# EAGLE board led_strip_panel (EAGLE 8.4.2)
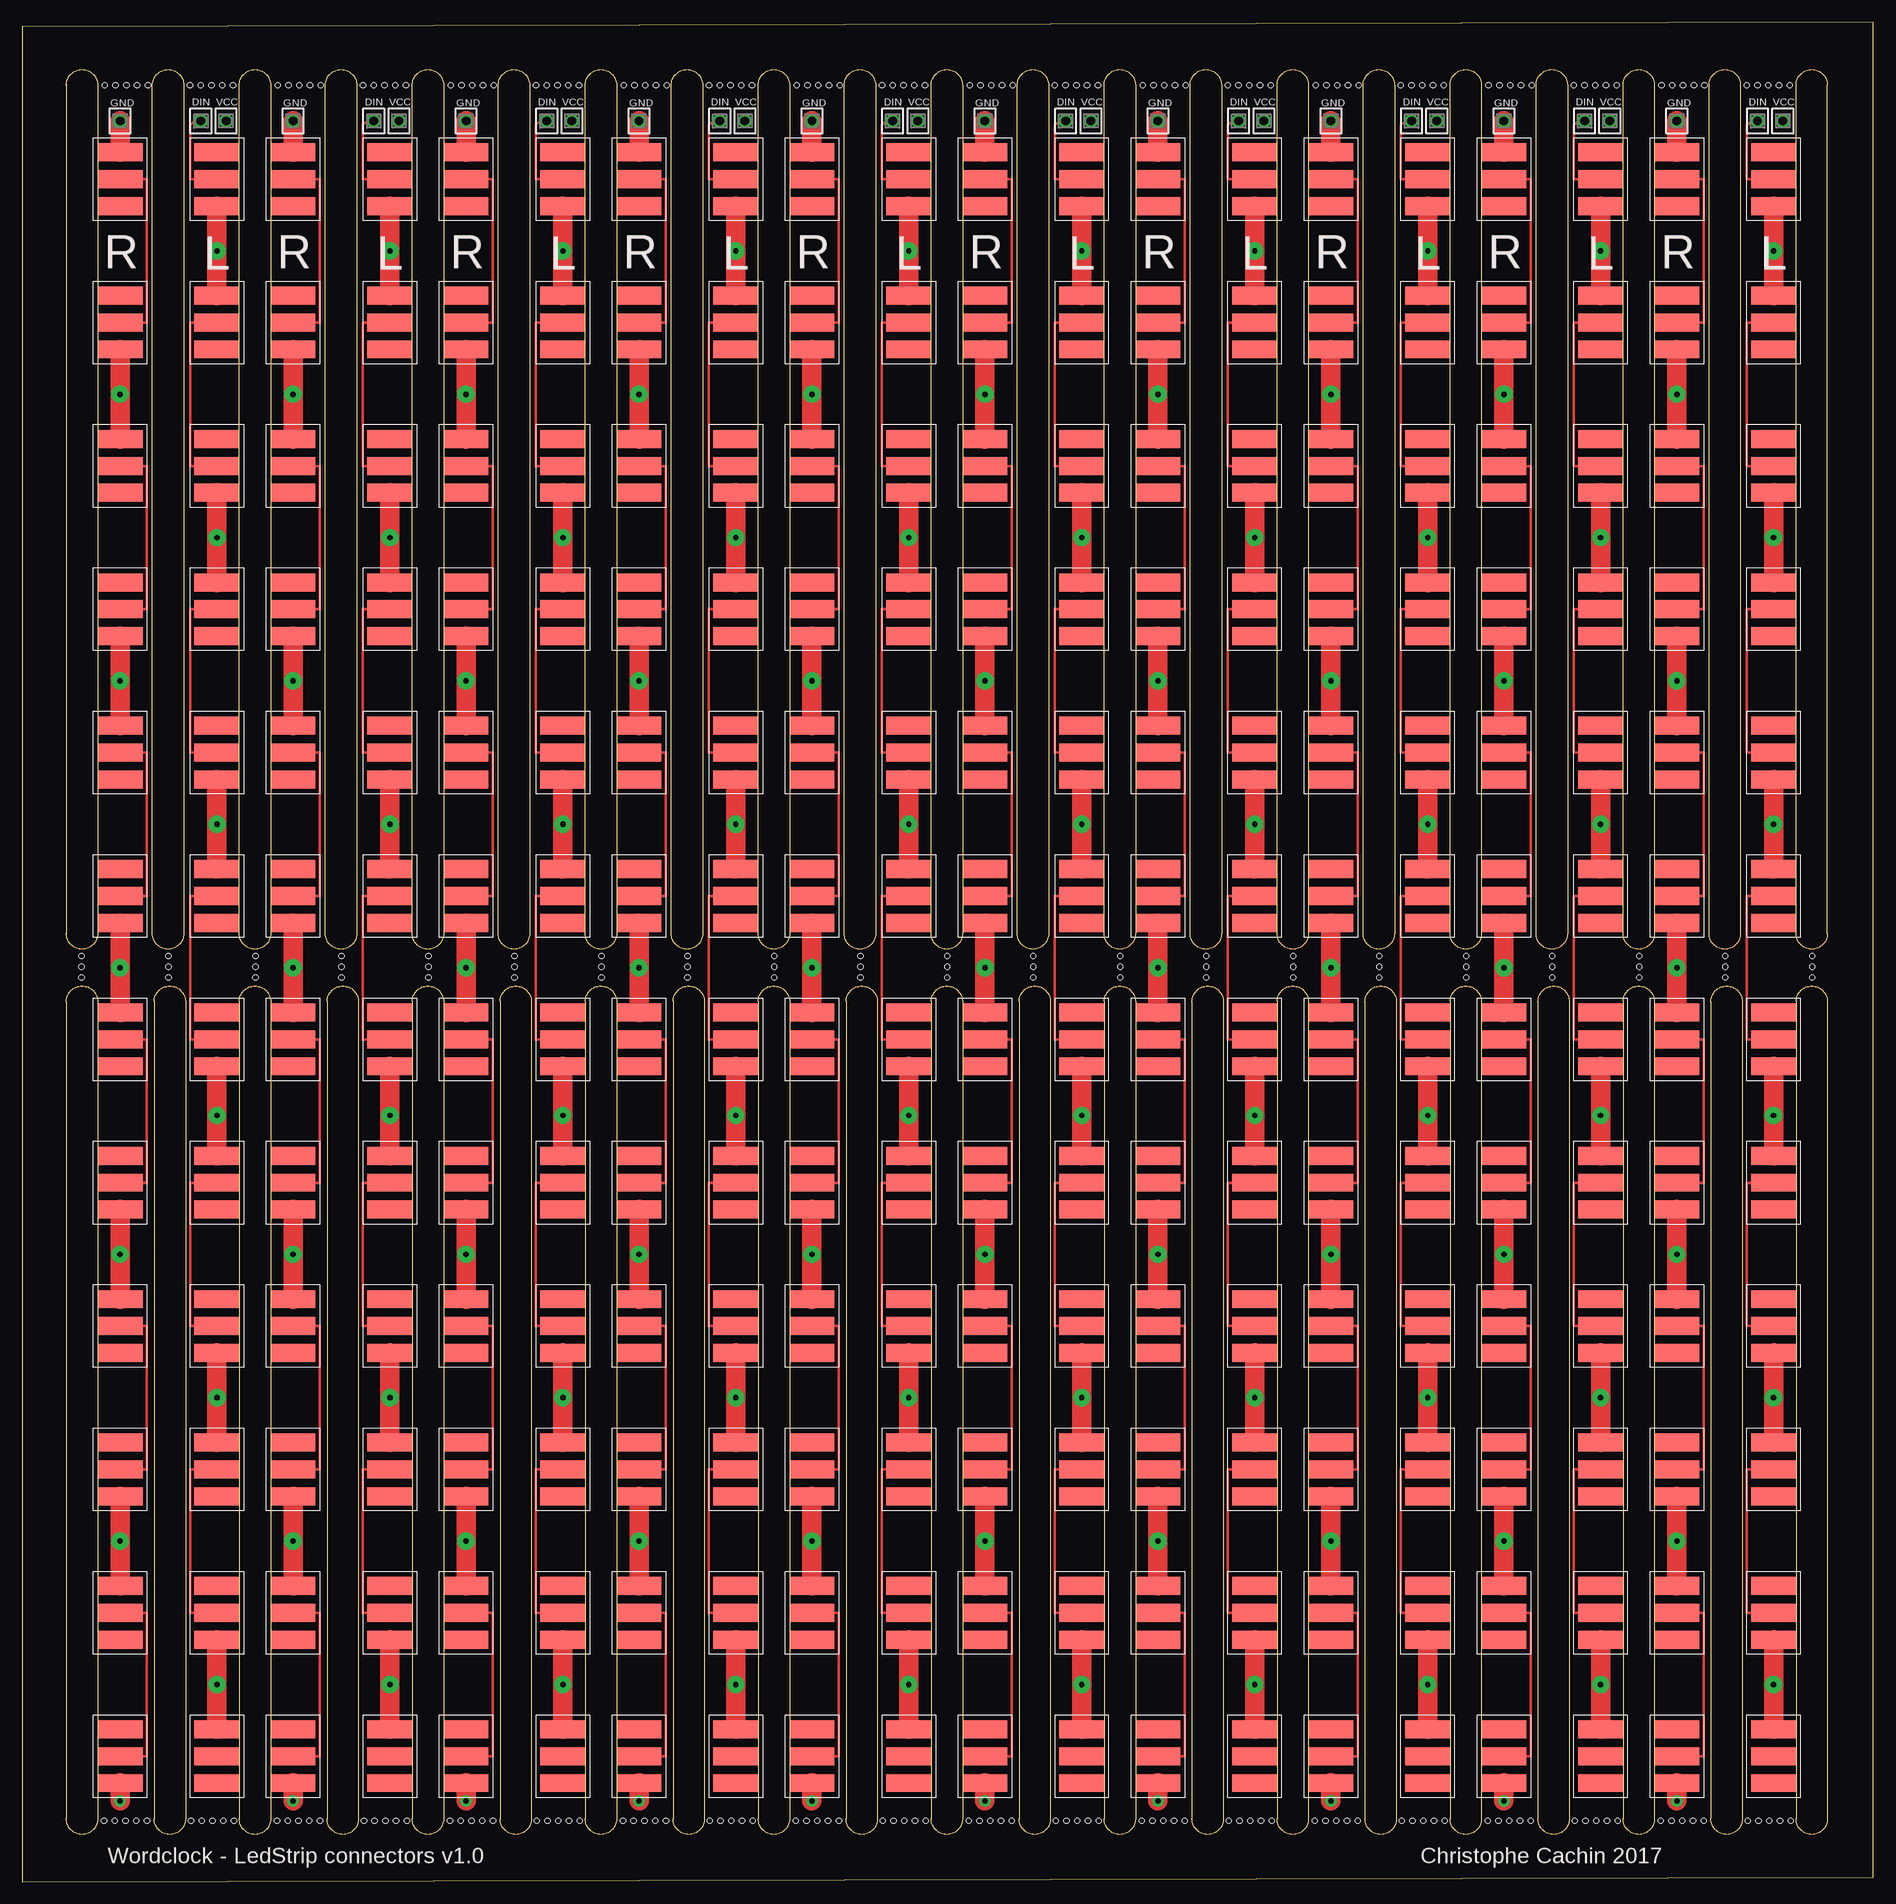
[diagram p0: board, top side]
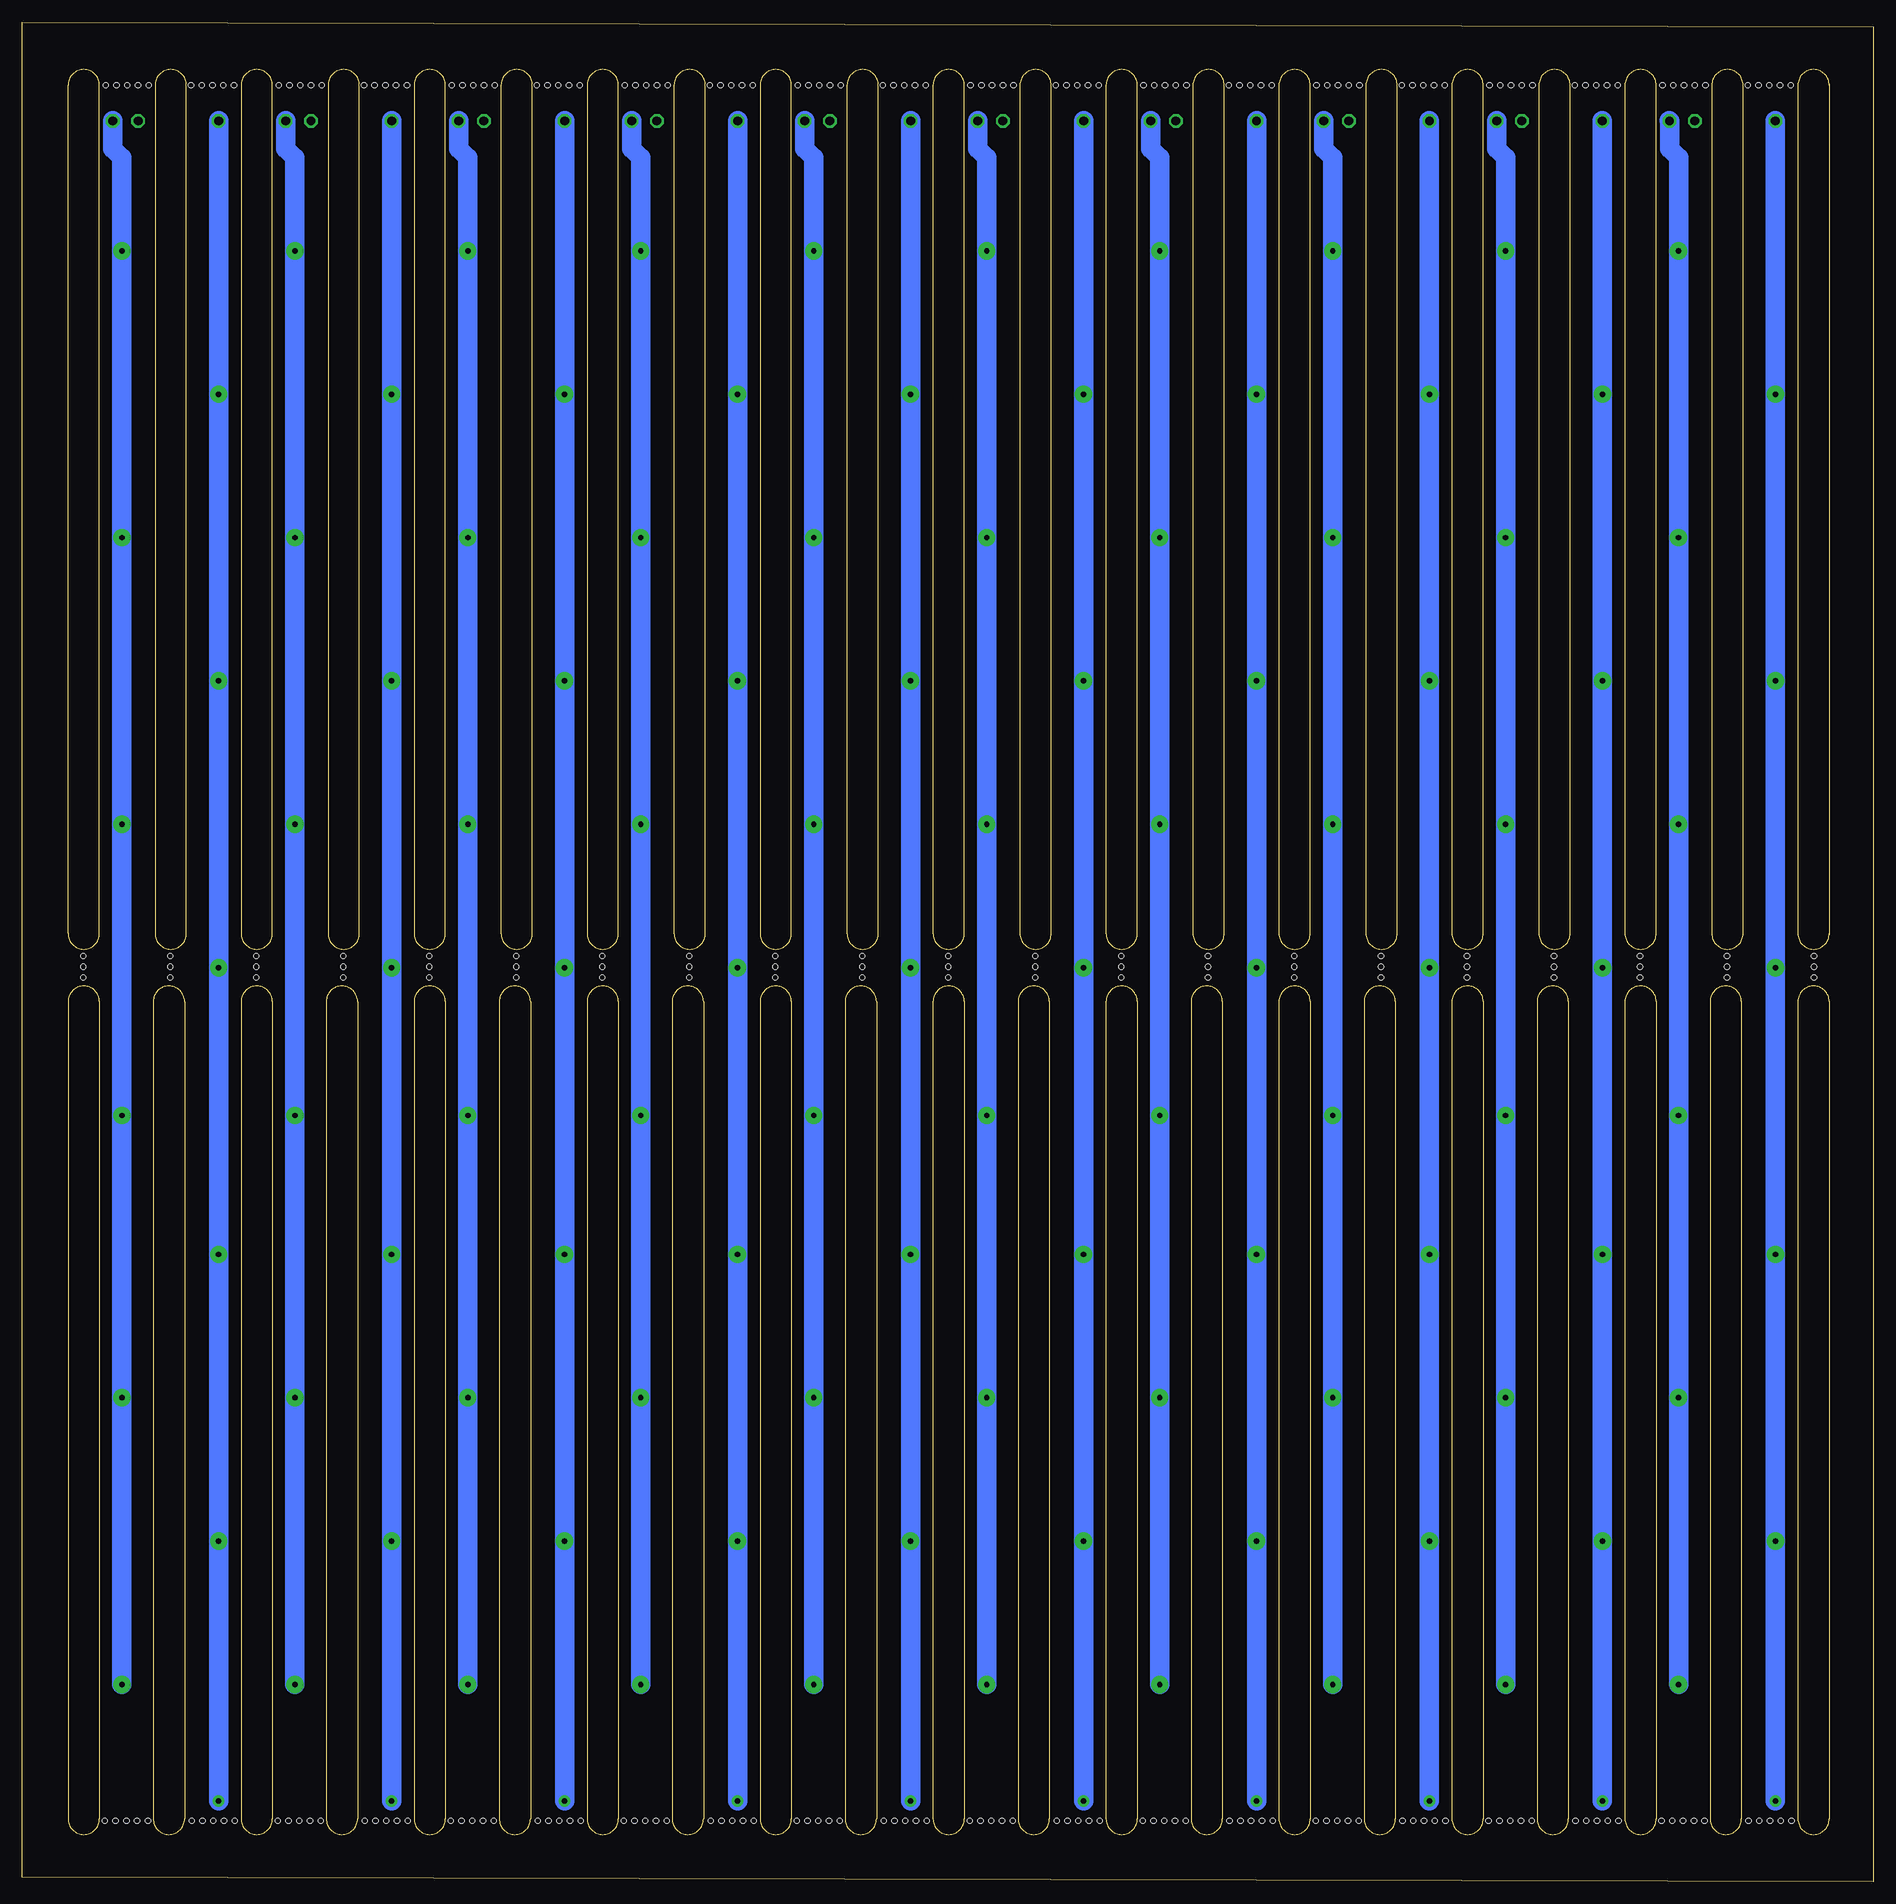
[diagram p1: board, bottom side, seen from below]

Size 206.5 x 207.5 mm. Coordinates in mm from the lower left corner, seen from the top.
Outline: 172 segments
Copper layers (1*16): Top 0.035mm / dielectric 1.5mm / Bottom 0.035mm
Design rules "default": minimum track width 10mil, minimum drill 24mil, track to track 8mil, track to pad 8mil, pad to pad 8mil, via to via 8mil, smd to smd 8mil, copper to edge 40mil, drill to drill 8mil, minimum pad ring 10mil, minimum via ring 8mil, stop-mask expansion 4mil, vias tented up to drill 0mil, thermal gap 10mil
Holes 0.6 mm at 9.2,200.5 10.4,200.5 11.6,200.5 12.8,200.5 18.7,200.5 19.9,200.5 21.1,200.5 22.3,200.5 14,200.5 23.5,200.5 9.1,6.8 10.3,6.8 11.5,6.8 12.7,6.8 13.9,6.8 18.8,6.8 20,6.8 21.2,6.8 22.4,6.8 23.6,6.8 6.6,100.9 6.6,102.1 6.6,103.3 16.3,100.9 16.3,102.1 16.3,103.3 26,100.9 26,102.1 26,103.3 28.5,200.5 29.7,200.5 30.9,200.5 32.1,200.5 38,200.5 39.2,200.5 40.4,200.5 41.6,200.5 33.3,200.5 42.8,200.5 28.4,6.8 29.6,6.8 30.8,6.8 32,6.8 33.2,6.8 38.1,6.8 39.3,6.8 40.5,6.8 41.7,6.8 42.9,6.8 35.6,100.9 35.6,102.1 35.6,103.3 45.3,100.9 45.3,102.1 45.3,103.3 47.8,200.5 49,200.5 50.2,200.5 51.4,200.5 57.3,200.5 58.5,200.5 59.7,200.5 60.9,200.5 52.6,200.5 62.1,200.5 47.7,6.8 48.9,6.8 50.1,6.8 51.3,6.8 52.5,6.8 57.4,6.8 58.6,6.8 59.8,6.8 61,6.8 62.2,6.8 54.9,100.9 54.9,102.1 54.9,103.3 64.6,100.9 64.6,102.1 64.6,103.3 67.1,200.5 68.3,200.5 69.5,200.5 70.7,200.5 76.6,200.5 77.8,200.5 79,200.5 80.2,200.5 71.9,200.5 81.4,200.5 67,6.8 68.2,6.8 69.4,6.8 70.6,6.8 71.8,6.8 76.7,6.8 77.9,6.8 79.1,6.8 80.3,6.8 81.5,6.8 74.2,100.9 74.2,102.1 74.2,103.3 83.9,100.9 83.9,102.1 83.9,103.3 86.4,200.5 87.6,200.5 88.8,200.5 90,200.5 95.9,200.5 97.1,200.5 98.3,200.5 99.5,200.5 91.2,200.5 100.7,200.5 86.3,6.8 87.5,6.8 88.7,6.8 89.9,6.8 91.1,6.8 96,6.8 97.2,6.8 98.4,6.8 99.6,6.8 100.8,6.8 93.5,100.9 93.5,102.1 93.5,103.3 103.2,100.9 103.2,102.1 103.2,103.3 105.7,200.5 106.9,200.5 108.1,200.5 109.3,200.5 115.2,200.5 116.4,200.5 117.6,200.5 118.8,200.5 110.5,200.5 120,200.5 105.6,6.8 106.8,6.8 108,6.8 109.2,6.8 110.4,6.8 115.3,6.8 116.5,6.8 117.7,6.8 118.9,6.8 120.1,6.8 112.8,100.9 112.8,102.1 112.8,103.3 122.5,100.9 122.5,102.1 122.5,103.3 125,200.5 126.2,200.5 127.4,200.5 128.6,200.5 134.5,200.5 135.7,200.5 136.9,200.5 138.1,200.5 129.8,200.5 139.3,200.5 124.9,6.8 126.1,6.8 127.3,6.8 128.5,6.8 129.7,6.8 134.6,6.8 135.8,6.8 137,6.8 138.2,6.8 139.4,6.8 132.1,100.9 132.1,102.1 132.1,103.3 141.8,100.9 141.8,102.1 141.8,103.3 144.3,200.5 145.5,200.5 146.7,200.5 147.9,200.5 153.8,200.5 155,200.5 156.2,200.5 157.4,200.5 149.1,200.5 158.6,200.5 144.2,6.8 145.4,6.8 146.6,6.8 147.8,6.8 149,6.8 153.9,6.8 155.1,6.8 156.3,6.8 157.5,6.8 158.7,6.8 151.4,100.9 151.4,102.1 151.4,103.3 161.1,100.9 161.1,102.1 161.1,103.3 163.6,200.5 164.8,200.5 166,200.5 167.2,200.5 173.1,200.5 174.3,200.5 175.5,200.5 176.7,200.5 168.4,200.5 177.9,200.5 163.5,6.8 164.7,6.8 165.9,6.8 167.1,6.8 168.3,6.8 173.2,6.8 174.4,6.8 175.6,6.8 176.8,6.8 178,6.8 170.7,100.9 170.7,102.1 170.7,103.3 180.4,100.9 180.4,102.1 180.4,103.3 182.9,200.5 184.1,200.5 185.3,200.5 186.5,200.5 192.4,200.5 193.6,200.5 194.8,200.5 196,200.5 187.7,200.5 197.2,200.5 182.8,6.8 184,6.8 185.2,6.8 186.4,6.8 187.6,6.8 192.5,6.8 193.7,6.8 194.9,6.8 196.1,6.8 197.3,6.8 190,100.9 190,102.1 190,103.3 199.7,100.9 199.7,102.1 199.7,103.3

## Footprints (pad centres in the part's own frame; a part is rotated, then mirrored left to right if it is on the bottom)
LED_STRIP = smd 5 x 2: DATAS 0,0; P$1 0,3; P$2 0,-3
SSW-101-02-S-S = drill 1 pad 1.5 octagon: 1 0,0

## Placement (x,y rotation side)
1  1  [LED_STRIP]  10.9,190 0 top
2  LED_STRIP  [LED_STRIP]  10.9,174 180 top
3  LED_STRIP  [LED_STRIP]  10.9,158 0 top
4  LED_STRIP  [LED_STRIP]  10.9,142 180 top
5  LED_STRIP  [LED_STRIP]  10.9,126 0 top
6  LED_STRIP  [LED_STRIP]  10.9,110 180 top
7  LED_STRIP  [LED_STRIP]  10.9,94 0 top
8  LED_STRIP  [LED_STRIP]  10.9,78 180 top
9  LED_STRIP  [LED_STRIP]  10.9,62 0 top
10  LED_STRIP  [LED_STRIP]  10.9,46 180 top
11  LED_STRIP  [LED_STRIP]  10.9,30 0 top
12  LED_STRIP  [LED_STRIP]  10.9,14 180 top
13  LED_STRIP  [LED_STRIP]  21.7,190 0 top
14  LED_STRIP  [LED_STRIP]  21.7,174 180 top
15  LED_STRIP  [LED_STRIP]  21.7,158 0 top
16  LED_STRIP  [LED_STRIP]  21.7,142 180 top
17  LED_STRIP  [LED_STRIP]  21.7,126 0 top
18  LED_STRIP  [LED_STRIP]  21.7,110 180 top
19  LED_STRIP  [LED_STRIP]  21.7,94 0 top
20  LED_STRIP  [LED_STRIP]  21.7,78 180 top
21  LED_STRIP  [LED_STRIP]  21.7,62 0 top
22  LED_STRIP  [LED_STRIP]  21.7,46 180 top
23  LED_STRIP  [LED_STRIP]  21.7,30 0 top
24  LED_STRIP  [LED_STRIP]  21.7,14 180 top
25  1  [LED_STRIP]  30.2,190 0 top
26  LED_STRIP  [LED_STRIP]  30.2,46 180 top
27  LED_STRIP  [LED_STRIP]  30.2,30 0 top
28  LED_STRIP  [LED_STRIP]  30.2,14 180 top
29  LED_STRIP  [LED_STRIP]  41,190 0 top
30  LED_STRIP  [LED_STRIP]  41,174 180 top
31  LED_STRIP  [LED_STRIP]  41,158 0 top
32  LED_STRIP  [LED_STRIP]  41,142 180 top
33  LED_STRIP  [LED_STRIP]  41,126 0 top
34  LED_STRIP  [LED_STRIP]  41,110 180 top
35  LED_STRIP  [LED_STRIP]  41,94 0 top
36  LED_STRIP  [LED_STRIP]  30.2,174 180 top
37  LED_STRIP  [LED_STRIP]  41,78 180 top
38  LED_STRIP  [LED_STRIP]  41,62 0 top
39  LED_STRIP  [LED_STRIP]  41,46 180 top
40  LED_STRIP  [LED_STRIP]  41,30 0 top
41  LED_STRIP  [LED_STRIP]  41,14 180 top
42  LED_STRIP  [LED_STRIP]  30.2,158 0 top
43  LED_STRIP  [LED_STRIP]  30.2,142 180 top
44  LED_STRIP  [LED_STRIP]  30.2,126 0 top
45  LED_STRIP  [LED_STRIP]  30.2,110 180 top
46  LED_STRIP  [LED_STRIP]  30.2,94 0 top
47  LED_STRIP  [LED_STRIP]  30.2,78 180 top
48  LED_STRIP  [LED_STRIP]  30.2,62 0 top
49  1  [LED_STRIP]  49.5,190 0 top
50  LED_STRIP  [LED_STRIP]  49.5,46 180 top
51  LED_STRIP  [LED_STRIP]  49.5,30 0 top
52  LED_STRIP  [LED_STRIP]  49.5,14 180 top
53  LED_STRIP  [LED_STRIP]  60.3,190 0 top
54  LED_STRIP  [LED_STRIP]  60.3,174 180 top
55  LED_STRIP  [LED_STRIP]  60.3,158 0 top
56  LED_STRIP  [LED_STRIP]  60.3,142 180 top
57  LED_STRIP  [LED_STRIP]  60.3,126 0 top
58  LED_STRIP  [LED_STRIP]  60.3,110 180 top
59  LED_STRIP  [LED_STRIP]  60.3,94 0 top
60  LED_STRIP  [LED_STRIP]  49.5,174 180 top
61  LED_STRIP  [LED_STRIP]  60.3,78 180 top
62  LED_STRIP  [LED_STRIP]  60.3,62 0 top
63  LED_STRIP  [LED_STRIP]  60.3,46 180 top
64  LED_STRIP  [LED_STRIP]  60.3,30 0 top
65  LED_STRIP  [LED_STRIP]  60.3,14 180 top
66  LED_STRIP  [LED_STRIP]  49.5,158 0 top
67  LED_STRIP  [LED_STRIP]  49.5,142 180 top
68  LED_STRIP  [LED_STRIP]  49.5,126 0 top
69  LED_STRIP  [LED_STRIP]  49.5,110 180 top
70  LED_STRIP  [LED_STRIP]  49.5,94 0 top
71  LED_STRIP  [LED_STRIP]  49.5,78 180 top
72  LED_STRIP  [LED_STRIP]  49.5,62 0 top
73  1  [LED_STRIP]  68.8,190 0 top
74  LED_STRIP  [LED_STRIP]  68.8,46 180 top
75  LED_STRIP  [LED_STRIP]  68.8,30 0 top
76  LED_STRIP  [LED_STRIP]  68.8,14 180 top
77  LED_STRIP  [LED_STRIP]  79.6,190 0 top
78  LED_STRIP  [LED_STRIP]  79.6,174 180 top
79  LED_STRIP  [LED_STRIP]  79.6,158 0 top
80  LED_STRIP  [LED_STRIP]  79.6,142 180 top
81  LED_STRIP  [LED_STRIP]  79.6,126 0 top
82  LED_STRIP  [LED_STRIP]  79.6,110 180 top
83  LED_STRIP  [LED_STRIP]  79.6,94 0 top
84  LED_STRIP  [LED_STRIP]  68.8,174 180 top
85  LED_STRIP  [LED_STRIP]  79.6,78 180 top
86  LED_STRIP  [LED_STRIP]  79.6,62 0 top
87  LED_STRIP  [LED_STRIP]  79.6,46 180 top
88  LED_STRIP  [LED_STRIP]  79.6,30 0 top
89  LED_STRIP  [LED_STRIP]  79.6,14 180 top
90  LED_STRIP  [LED_STRIP]  68.8,158 0 top
91  LED_STRIP  [LED_STRIP]  68.8,142 180 top
92  LED_STRIP  [LED_STRIP]  68.8,126 0 top
93  LED_STRIP  [LED_STRIP]  68.8,110 180 top
94  LED_STRIP  [LED_STRIP]  68.8,94 0 top
95  LED_STRIP  [LED_STRIP]  68.8,78 180 top
96  LED_STRIP  [LED_STRIP]  68.8,62 0 top
97  1  [LED_STRIP]  88.1,190 0 top
98  LED_STRIP  [LED_STRIP]  88.1,46 180 top
99  LED_STRIP  [LED_STRIP]  88.1,30 0 top
100  LED_STRIP  [LED_STRIP]  88.1,14 180 top
101  LED_STRIP  [LED_STRIP]  98.9,190 0 top
102  LED_STRIP  [LED_STRIP]  98.9,174 180 top
103  LED_STRIP  [LED_STRIP]  98.9,158 0 top
104  LED_STRIP  [LED_STRIP]  98.9,142 180 top
105  LED_STRIP  [LED_STRIP]  98.9,126 0 top
106  LED_STRIP  [LED_STRIP]  98.9,110 180 top
107  LED_STRIP  [LED_STRIP]  98.9,94 0 top
108  LED_STRIP  [LED_STRIP]  88.1,174 180 top
109  LED_STRIP  [LED_STRIP]  98.9,78 180 top
110  LED_STRIP  [LED_STRIP]  98.9,62 0 top
111  LED_STRIP  [LED_STRIP]  98.9,46 180 top
112  LED_STRIP  [LED_STRIP]  98.9,30 0 top
113  LED_STRIP  [LED_STRIP]  98.9,14 180 top
114  LED_STRIP  [LED_STRIP]  88.1,158 0 top
115  LED_STRIP  [LED_STRIP]  88.1,142 180 top
116  LED_STRIP  [LED_STRIP]  88.1,126 0 top
117  LED_STRIP  [LED_STRIP]  88.1,110 180 top
118  LED_STRIP  [LED_STRIP]  88.1,94 0 top
119  LED_STRIP  [LED_STRIP]  88.1,78 180 top
120  LED_STRIP  [LED_STRIP]  88.1,62 0 top
121  1  [LED_STRIP]  107.4,190 0 top
122  LED_STRIP  [LED_STRIP]  107.4,46 180 top
123  LED_STRIP  [LED_STRIP]  107.4,30 0 top
124  LED_STRIP  [LED_STRIP]  107.4,14 180 top
125  LED_STRIP  [LED_STRIP]  118.2,190 0 top
126  LED_STRIP  [LED_STRIP]  118.2,174 180 top
127  LED_STRIP  [LED_STRIP]  118.2,158 0 top
128  LED_STRIP  [LED_STRIP]  118.2,142 180 top
129  LED_STRIP  [LED_STRIP]  118.2,126 0 top
130  LED_STRIP  [LED_STRIP]  118.2,110 180 top
131  LED_STRIP  [LED_STRIP]  118.2,94 0 top
132  LED_STRIP  [LED_STRIP]  107.4,174 180 top
133  LED_STRIP  [LED_STRIP]  118.2,78 180 top
134  LED_STRIP  [LED_STRIP]  118.2,62 0 top
135  LED_STRIP  [LED_STRIP]  118.2,46 180 top
136  LED_STRIP  [LED_STRIP]  118.2,30 0 top
137  LED_STRIP  [LED_STRIP]  118.2,14 180 top
138  LED_STRIP  [LED_STRIP]  107.4,158 0 top
139  LED_STRIP  [LED_STRIP]  107.4,142 180 top
140  LED_STRIP  [LED_STRIP]  107.4,126 0 top
141  LED_STRIP  [LED_STRIP]  107.4,110 180 top
142  LED_STRIP  [LED_STRIP]  107.4,94 0 top
143  LED_STRIP  [LED_STRIP]  107.4,78 180 top
144  LED_STRIP  [LED_STRIP]  107.4,62 0 top
145  1  [LED_STRIP]  126.7,190 0 top
146  LED_STRIP  [LED_STRIP]  126.7,46 180 top
147  LED_STRIP  [LED_STRIP]  126.7,30 0 top
148  LED_STRIP  [LED_STRIP]  126.7,14 180 top
149  LED_STRIP  [LED_STRIP]  137.5,190 0 top
150  LED_STRIP  [LED_STRIP]  137.5,174 180 top
151  LED_STRIP  [LED_STRIP]  137.5,158 0 top
152  LED_STRIP  [LED_STRIP]  137.5,142 180 top
153  LED_STRIP  [LED_STRIP]  137.5,126 0 top
154  LED_STRIP  [LED_STRIP]  137.5,110 180 top
155  LED_STRIP  [LED_STRIP]  137.5,94 0 top
156  LED_STRIP  [LED_STRIP]  126.7,174 180 top
157  LED_STRIP  [LED_STRIP]  137.5,78 180 top
158  LED_STRIP  [LED_STRIP]  137.5,62 0 top
159  LED_STRIP  [LED_STRIP]  137.5,46 180 top
160  LED_STRIP  [LED_STRIP]  137.5,30 0 top
161  LED_STRIP  [LED_STRIP]  137.5,14 180 top
162  LED_STRIP  [LED_STRIP]  126.7,158 0 top
163  LED_STRIP  [LED_STRIP]  126.7,142 180 top
164  LED_STRIP  [LED_STRIP]  126.7,126 0 top
165  LED_STRIP  [LED_STRIP]  126.7,110 180 top
166  LED_STRIP  [LED_STRIP]  126.7,94 0 top
167  LED_STRIP  [LED_STRIP]  126.7,78 180 top
168  LED_STRIP  [LED_STRIP]  126.7,62 0 top
169  1  [LED_STRIP]  146,190 0 top
170  LED_STRIP  [LED_STRIP]  146,46 180 top
171  LED_STRIP  [LED_STRIP]  146,30 0 top
172  LED_STRIP  [LED_STRIP]  146,14 180 top
173  LED_STRIP  [LED_STRIP]  156.8,190 0 top
174  LED_STRIP  [LED_STRIP]  156.8,174 180 top
175  LED_STRIP  [LED_STRIP]  156.8,158 0 top
176  LED_STRIP  [LED_STRIP]  156.8,142 180 top
177  LED_STRIP  [LED_STRIP]  156.8,126 0 top
178  LED_STRIP  [LED_STRIP]  156.8,110 180 top
179  LED_STRIP  [LED_STRIP]  156.8,94 0 top
180  LED_STRIP  [LED_STRIP]  146,174 180 top
181  LED_STRIP  [LED_STRIP]  156.8,78 180 top
182  LED_STRIP  [LED_STRIP]  156.8,62 0 top
183  LED_STRIP  [LED_STRIP]  156.8,46 180 top
184  LED_STRIP  [LED_STRIP]  156.8,30 0 top
185  LED_STRIP  [LED_STRIP]  156.8,14 180 top
186  LED_STRIP  [LED_STRIP]  146,158 0 top
187  LED_STRIP  [LED_STRIP]  146,142 180 top
188  LED_STRIP  [LED_STRIP]  146,126 0 top
189  LED_STRIP  [LED_STRIP]  146,110 180 top
190  LED_STRIP  [LED_STRIP]  146,94 0 top
191  LED_STRIP  [LED_STRIP]  146,78 180 top
192  LED_STRIP  [LED_STRIP]  146,62 0 top
193  1  [LED_STRIP]  165.3,190 0 top
194  LED_STRIP  [LED_STRIP]  165.3,46 180 top
195  LED_STRIP  [LED_STRIP]  165.3,30 0 top
196  LED_STRIP  [LED_STRIP]  165.3,14 180 top
197  LED_STRIP  [LED_STRIP]  176.1,190 0 top
198  LED_STRIP  [LED_STRIP]  176.1,174 180 top
199  LED_STRIP  [LED_STRIP]  176.1,158 0 top
200  LED_STRIP  [LED_STRIP]  176.1,142 180 top
201  LED_STRIP  [LED_STRIP]  176.1,126 0 top
202  LED_STRIP  [LED_STRIP]  176.1,110 180 top
203  LED_STRIP  [LED_STRIP]  176.1,94 0 top
204  LED_STRIP  [LED_STRIP]  165.3,174 180 top
205  LED_STRIP  [LED_STRIP]  176.1,78 180 top
206  LED_STRIP  [LED_STRIP]  176.1,62 0 top
207  LED_STRIP  [LED_STRIP]  176.1,46 180 top
208  LED_STRIP  [LED_STRIP]  176.1,30 0 top
209  LED_STRIP  [LED_STRIP]  176.1,14 180 top
210  LED_STRIP  [LED_STRIP]  165.3,158 0 top
211  LED_STRIP  [LED_STRIP]  165.3,142 180 top
212  LED_STRIP  [LED_STRIP]  165.3,126 0 top
213  LED_STRIP  [LED_STRIP]  165.3,110 180 top
214  LED_STRIP  [LED_STRIP]  165.3,94 0 top
215  LED_STRIP  [LED_STRIP]  165.3,78 180 top
216  LED_STRIP  [LED_STRIP]  165.3,62 0 top
217  1  [LED_STRIP]  184.6,190 0 top
218  LED_STRIP  [LED_STRIP]  184.6,46 180 top
219  LED_STRIP  [LED_STRIP]  184.6,30 0 top
220  LED_STRIP  [LED_STRIP]  184.6,14 180 top
221  LED_STRIP  [LED_STRIP]  195.4,190 0 top
222  LED_STRIP  [LED_STRIP]  195.4,174 180 top
223  LED_STRIP  [LED_STRIP]  195.4,158 0 top
224  LED_STRIP  [LED_STRIP]  195.4,142 180 top
225  LED_STRIP  [LED_STRIP]  195.4,126 0 top
226  LED_STRIP  [LED_STRIP]  195.4,110 180 top
227  LED_STRIP  [LED_STRIP]  195.4,94 0 top
228  LED_STRIP  [LED_STRIP]  184.6,174 180 top
229  LED_STRIP  [LED_STRIP]  195.4,78 180 top
230  LED_STRIP  [LED_STRIP]  195.4,62 0 top
231  LED_STRIP  [LED_STRIP]  195.4,46 180 top
232  LED_STRIP  [LED_STRIP]  195.4,30 0 top
233  LED_STRIP  [LED_STRIP]  195.4,14 180 top
234  LED_STRIP  [LED_STRIP]  184.6,158 0 top
235  LED_STRIP  [LED_STRIP]  184.6,142 180 top
236  LED_STRIP  [LED_STRIP]  184.6,126 0 top
237  LED_STRIP  [LED_STRIP]  184.6,110 180 top
238  LED_STRIP  [LED_STRIP]  184.6,94 0 top
239  LED_STRIP  [LED_STRIP]  184.6,78 180 top
240  LED_STRIP  [LED_STRIP]  184.6,62 0 top
DIN  DATA  [SSW-101-02-S-S]  19.9,196.5 270 top
DIN1  DATA  [SSW-101-02-S-S]  39.2,196.5 270 top
DIN2  DATA  [SSW-101-02-S-S]  58.5,196.5 270 top
DIN3  DATA  [SSW-101-02-S-S]  77.8,196.5 270 top
DIN4  DATA  [SSW-101-02-S-S]  97.1,196.5 270 top
DIN5  DATA  [SSW-101-02-S-S]  116.4,196.5 270 top
DIN6  DATA  [SSW-101-02-S-S]  135.7,196.5 270 top
DIN7  DATA  [SSW-101-02-S-S]  155,196.5 270 top
DIN8  DATA  [SSW-101-02-S-S]  174.3,196.5 270 top
DIN9  DATA  [SSW-101-02-S-S]  193.6,196.5 270 top
GND  GND  [SSW-101-02-S-S]  10.9,196.5 90 top
GND1  GND  [SSW-101-02-S-S]  30.2,196.5 90 top
GND2  GND  [SSW-101-02-S-S]  49.5,196.5 90 top
GND3  GND  [SSW-101-02-S-S]  68.8,196.5 90 top
GND4  GND  [SSW-101-02-S-S]  88.1,196.5 90 top
GND5  GND  [SSW-101-02-S-S]  107.4,196.5 90 top
GND6  GND  [SSW-101-02-S-S]  126.7,196.5 90 top
GND7  GND  [SSW-101-02-S-S]  146,196.5 90 top
GND8  GND  [SSW-101-02-S-S]  165.3,196.5 90 top
GND9  GND  [SSW-101-02-S-S]  184.6,196.5 90 top
VCC  VCC  [SSW-101-02-S-S]  22.72,196.5 90 top
VCC1  VCC  [SSW-101-02-S-S]  42.02,196.5 90 top
VCC2  VCC  [SSW-101-02-S-S]  61.32,196.5 90 top
VCC3  VCC  [SSW-101-02-S-S]  80.62,196.5 90 top
VCC4  VCC  [SSW-101-02-S-S]  99.92,196.5 90 top
VCC5  VCC  [SSW-101-02-S-S]  119.22,196.5 90 top
VCC6  VCC  [SSW-101-02-S-S]  138.52,196.5 90 top
VCC7  VCC  [SSW-101-02-S-S]  157.82,196.5 90 top
VCC8  VCC  [SSW-101-02-S-S]  177.12,196.5 90 top
VCC9  VCC  [SSW-101-02-S-S]  196.42,196.5 90 top

## Library data of the parts
1-240 = led_strip
DIN DIN1-DIN9 GND GND1-GND9 VCC VCC1-VCC9 = con-samtec; MPN: SSW-101-02-S-S; OC_FARNELL: unknown; OC_NEWARK: 11P9336

## Nets
GND: 1.P$1 2.P$1 3.P$1 4.P$1 5.P$1 6.P$1 7.P$1 8.P$1 9.P$1 10.P$1 11.P$1 12.P$1 GND.1
GND1: 25.P$1 26.P$1 27.P$1 28.P$1 36.P$1 42.P$1 43.P$1 44.P$1 45.P$1 46.P$1 47.P$1 48.P$1 GND1.1
GND2: 49.P$1 50.P$1 51.P$1 52.P$1 60.P$1 66.P$1 67.P$1 68.P$1 69.P$1 70.P$1 71.P$1 72.P$1 GND2.1
GND3: 73.P$1 74.P$1 75.P$1 76.P$1 84.P$1 90.P$1 91.P$1 92.P$1 93.P$1 94.P$1 95.P$1 96.P$1 GND3.1
GND4: 97.P$1 98.P$1 99.P$1 100.P$1 108.P$1 114.P$1 115.P$1 116.P$1 117.P$1 118.P$1 119.P$1 120.P$1 GND4.1
GND5: 121.P$1 122.P$1 123.P$1 124.P$1 132.P$1 138.P$1 139.P$1 140.P$1 141.P$1 142.P$1 143.P$1 144.P$1 GND5.1
GND6: 145.P$1 146.P$1 147.P$1 148.P$1 156.P$1 162.P$1 163.P$1 164.P$1 165.P$1 166.P$1 167.P$1 168.P$1 GND6.1
GND7: 169.P$1 170.P$1 171.P$1 172.P$1 180.P$1 186.P$1 187.P$1 188.P$1 189.P$1 190.P$1 191.P$1 192.P$1 GND7.1
GND8: 193.P$1 194.P$1 195.P$1 196.P$1 204.P$1 210.P$1 211.P$1 212.P$1 213.P$1 214.P$1 215.P$1 216.P$1 GND8.1
GND9: 217.P$1 218.P$1 219.P$1 220.P$1 228.P$1 234.P$1 235.P$1 236.P$1 237.P$1 238.P$1 239.P$1 240.P$1 GND9.1
N$1: 13.DATAS DIN.1
N$2: 1.DATAS 2.DATAS
N$3: 14.DATAS 15.DATAS
N$4: 3.DATAS 4.DATAS
N$5: 16.DATAS 17.DATAS
N$6: 5.DATAS 6.DATAS
N$7: 18.DATAS 19.DATAS
N$8: 7.DATAS 8.DATAS
N$9: 20.DATAS 21.DATAS
N$10: 22.DATAS 23.DATAS
N$11: 9.DATAS 10.DATAS
N$12: 11.DATAS 12.DATAS
N$13: 29.DATAS DIN1.1
N$14: 25.DATAS 36.DATAS
N$15: 30.DATAS 31.DATAS
N$16: 42.DATAS 43.DATAS
N$17: 32.DATAS 33.DATAS
N$18: 44.DATAS 45.DATAS
N$19: 34.DATAS 35.DATAS
N$20: 46.DATAS 47.DATAS
N$21: 37.DATAS 38.DATAS
N$22: 39.DATAS 40.DATAS
N$23: 26.DATAS 48.DATAS
N$24: 27.DATAS 28.DATAS
N$25: 53.DATAS DIN2.1
N$26: 49.DATAS 60.DATAS
N$27: 54.DATAS 55.DATAS
N$28: 66.DATAS 67.DATAS
N$29: 56.DATAS 57.DATAS
N$30: 68.DATAS 69.DATAS
N$31: 58.DATAS 59.DATAS
N$32: 70.DATAS 71.DATAS
N$33: 61.DATAS 62.DATAS
N$34: 63.DATAS 64.DATAS
N$35: 50.DATAS 72.DATAS
N$36: 51.DATAS 52.DATAS
N$37: 77.DATAS DIN3.1
N$38: 73.DATAS 84.DATAS
N$39: 78.DATAS 79.DATAS
N$40: 90.DATAS 91.DATAS
N$41: 80.DATAS 81.DATAS
N$42: 92.DATAS 93.DATAS
N$43: 82.DATAS 83.DATAS
N$44: 94.DATAS 95.DATAS
N$45: 85.DATAS 86.DATAS
N$46: 87.DATAS 88.DATAS
N$47: 74.DATAS 96.DATAS
N$48: 75.DATAS 76.DATAS
N$49: 101.DATAS DIN4.1
N$50: 97.DATAS 108.DATAS
N$51: 102.DATAS 103.DATAS
N$52: 114.DATAS 115.DATAS
N$53: 104.DATAS 105.DATAS
N$54: 116.DATAS 117.DATAS
N$55: 106.DATAS 107.DATAS
N$56: 118.DATAS 119.DATAS
N$57: 109.DATAS 110.DATAS
N$58: 111.DATAS 112.DATAS
N$59: 98.DATAS 120.DATAS
N$60: 99.DATAS 100.DATAS
N$61: 125.DATAS DIN5.1
N$62: 121.DATAS 132.DATAS
N$63: 126.DATAS 127.DATAS
N$64: 138.DATAS 139.DATAS
N$65: 128.DATAS 129.DATAS
N$66: 140.DATAS 141.DATAS
N$67: 130.DATAS 131.DATAS
N$68: 142.DATAS 143.DATAS
N$69: 133.DATAS 134.DATAS
N$70: 135.DATAS 136.DATAS
N$71: 122.DATAS 144.DATAS
N$72: 123.DATAS 124.DATAS
N$73: 149.DATAS DIN6.1
N$74: 145.DATAS 156.DATAS
N$75: 150.DATAS 151.DATAS
N$76: 162.DATAS 163.DATAS
N$77: 152.DATAS 153.DATAS
N$78: 164.DATAS 165.DATAS
N$79: 154.DATAS 155.DATAS
N$80: 166.DATAS 167.DATAS
N$81: 157.DATAS 158.DATAS
N$82: 159.DATAS 160.DATAS
N$83: 146.DATAS 168.DATAS
N$84: 147.DATAS 148.DATAS
N$85: 173.DATAS DIN7.1
N$86: 169.DATAS 180.DATAS
N$87: 174.DATAS 175.DATAS
N$88: 186.DATAS 187.DATAS
N$89: 176.DATAS 177.DATAS
N$90: 188.DATAS 189.DATAS
N$91: 178.DATAS 179.DATAS
N$92: 190.DATAS 191.DATAS
N$93: 181.DATAS 182.DATAS
N$94: 183.DATAS 184.DATAS
N$95: 170.DATAS 192.DATAS
N$96: 171.DATAS 172.DATAS
N$97: 197.DATAS DIN8.1
N$98: 193.DATAS 204.DATAS
N$99: 198.DATAS 199.DATAS
N$100: 210.DATAS 211.DATAS
N$101: 200.DATAS 201.DATAS
N$102: 212.DATAS 213.DATAS
N$103: 202.DATAS 203.DATAS
N$104: 214.DATAS 215.DATAS
N$105: 205.DATAS 206.DATAS
N$106: 207.DATAS 208.DATAS
N$107: 194.DATAS 216.DATAS
N$108: 195.DATAS 196.DATAS
N$109: 221.DATAS DIN9.1
N$110: 217.DATAS 228.DATAS
N$111: 222.DATAS 223.DATAS
N$112: 234.DATAS 235.DATAS
N$113: 224.DATAS 225.DATAS
N$114: 236.DATAS 237.DATAS
N$115: 226.DATAS 227.DATAS
N$116: 238.DATAS 239.DATAS
N$117: 229.DATAS 230.DATAS
N$118: 231.DATAS 232.DATAS
N$119: 218.DATAS 240.DATAS
N$120: 219.DATAS 220.DATAS
VCC: 13.P$2 14.P$2 15.P$2 16.P$2 17.P$2 18.P$2 19.P$2 20.P$2 21.P$2 22.P$2 23.P$2 24.P$2 VCC.1
VCC1: 29.P$2 30.P$2 31.P$2 32.P$2 33.P$2 34.P$2 35.P$2 37.P$2 38.P$2 39.P$2 40.P$2 41.P$2 VCC1.1
VCC2: 53.P$2 54.P$2 55.P$2 56.P$2 57.P$2 58.P$2 59.P$2 61.P$2 62.P$2 63.P$2 64.P$2 65.P$2 VCC2.1
VCC3: 77.P$2 78.P$2 79.P$2 80.P$2 81.P$2 82.P$2 83.P$2 85.P$2 86.P$2 87.P$2 88.P$2 89.P$2 VCC3.1
VCC4: 101.P$2 102.P$2 103.P$2 104.P$2 105.P$2 106.P$2 107.P$2 109.P$2 110.P$2 111.P$2 112.P$2 113.P$2 VCC4.1
VCC5: 125.P$2 126.P$2 127.P$2 128.P$2 129.P$2 130.P$2 131.P$2 133.P$2 134.P$2 135.P$2 136.P$2 137.P$2 VCC5.1
VCC6: 149.P$2 150.P$2 151.P$2 152.P$2 153.P$2 154.P$2 155.P$2 157.P$2 158.P$2 159.P$2 160.P$2 161.P$2 VCC6.1
VCC7: 173.P$2 174.P$2 175.P$2 176.P$2 177.P$2 178.P$2 179.P$2 181.P$2 182.P$2 183.P$2 184.P$2 185.P$2 VCC7.1
VCC8: 197.P$2 198.P$2 199.P$2 200.P$2 201.P$2 202.P$2 203.P$2 205.P$2 206.P$2 207.P$2 208.P$2 209.P$2 VCC8.1
VCC9: 221.P$2 222.P$2 223.P$2 224.P$2 225.P$2 226.P$2 227.P$2 229.P$2 230.P$2 231.P$2 232.P$2 233.P$2 VCC9.1

## Tracks (layer width: path | path; a pad name or v marks a point on that pad's centre or on a via)
GND  (via drill 0.6 pad 1.27, 0.6 pad 1.93)
  Top 2.184: 2.P$1 v10.9,166 3.P$1 | 4.P$1 v10.9,134 5.P$1 | 6.P$1 v10.9,102 7.P$1 | 8.P$1 v10.9,70 9.P$1 | 10.P$1 v10.9,38 11.P$1 | GND.1 1.P$1 | v10.9,9 12.P$1
  Bottom 2.184: v10.9,9 v10.9,38 v10.9,70 v10.9,102 v10.9,134 v10.9,166 GND.1
GND1  (via drill 0.6 pad 1.27, 0.6 pad 1.93)
  Top 2.184: 36.P$1 v30.2,166 42.P$1 | 43.P$1 v30.2,134 44.P$1 | 45.P$1 v30.2,102 46.P$1 | 47.P$1 v30.2,70 48.P$1 | 26.P$1 v30.2,38 27.P$1 | GND1.1 25.P$1 | v30.2,9 28.P$1
  Bottom 2.184: v30.2,9 v30.2,38 v30.2,70 v30.2,102 v30.2,134 v30.2,166 GND1.1
GND2  (via drill 0.6 pad 1.27, 0.6 pad 1.93)
  Top 2.184: 60.P$1 v49.5,166 66.P$1 | 67.P$1 v49.5,134 68.P$1 | 69.P$1 v49.5,102 70.P$1 | 71.P$1 v49.5,70 72.P$1 | 50.P$1 v49.5,38 51.P$1 | GND2.1 49.P$1 | v49.5,9 52.P$1
  Bottom 2.184: v49.5,9 v49.5,38 v49.5,70 v49.5,102 v49.5,134 v49.5,166 GND2.1
GND3  (via drill 0.6 pad 1.27, 0.6 pad 1.93)
  Top 2.184: 84.P$1 v68.8,166 90.P$1 | 91.P$1 v68.8,134 92.P$1 | 93.P$1 v68.8,102 94.P$1 | 95.P$1 v68.8,70 96.P$1 | 74.P$1 v68.8,38 75.P$1 | GND3.1 73.P$1 | v68.8,9 76.P$1
  Bottom 2.184: v68.8,9 v68.8,38 v68.8,70 v68.8,102 v68.8,134 v68.8,166 GND3.1
GND4  (via drill 0.6 pad 1.27, 0.6 pad 1.93)
  Top 2.184: 108.P$1 v88.1,166 114.P$1 | 115.P$1 v88.1,134 116.P$1 | 117.P$1 v88.1,102 118.P$1 | 119.P$1 v88.1,70 120.P$1 | 98.P$1 v88.1,38 99.P$1 | GND4.1 97.P$1 | v88.1,9 100.P$1
  Bottom 2.184: v88.1,9 v88.1,38 v88.1,70 v88.1,102 v88.1,134 v88.1,166 GND4.1
GND5  (via drill 0.6 pad 1.27, 0.6 pad 1.93)
  Top 2.184: 132.P$1 v107.4,166 138.P$1 | 139.P$1 v107.4,134 140.P$1 | 141.P$1 v107.4,102 142.P$1 | 143.P$1 v107.4,70 144.P$1 | 122.P$1 v107.4,38 123.P$1 | GND5.1 121.P$1 | v107.4,9 124.P$1
  Bottom 2.184: v107.4,9 v107.4,38 v107.4,70 v107.4,102 v107.4,134 v107.4,166 GND5.1
GND6  (via drill 0.6 pad 1.27, 0.6 pad 1.93)
  Top 2.184: 156.P$1 v126.7,166 162.P$1 | 163.P$1 v126.7,134 164.P$1 | 165.P$1 v126.7,102 166.P$1 | 167.P$1 v126.7,70 168.P$1 | 146.P$1 v126.7,38 147.P$1 | GND6.1 145.P$1 | v126.7,9 148.P$1
  Bottom 2.184: v126.7,9 v126.7,38 v126.7,70 v126.7,102 v126.7,134 v126.7,166 GND6.1
GND7  (via drill 0.6 pad 1.27, 0.6 pad 1.93)
  Top 2.184: 180.P$1 v146,166 186.P$1 | 187.P$1 v146,134 188.P$1 | 189.P$1 v146,102 190.P$1 | 191.P$1 v146,70 192.P$1 | 170.P$1 v146,38 171.P$1 | GND7.1 169.P$1 | v146,9 172.P$1
  Bottom 2.184: v146,9 v146,38 v146,70 v146,102 v146,134 v146,166 GND7.1
GND8  (via drill 0.6 pad 1.27, 0.6 pad 1.93)
  Top 2.184: 204.P$1 v165.3,166 210.P$1 | 211.P$1 v165.3,134 212.P$1 | 213.P$1 v165.3,102 214.P$1 | 215.P$1 v165.3,70 216.P$1 | 194.P$1 v165.3,38 195.P$1 | GND8.1 193.P$1 | v165.3,9 196.P$1
  Bottom 2.184: v165.3,9 v165.3,38 v165.3,70 v165.3,102 v165.3,134 v165.3,166 GND8.1
GND9  (via drill 0.6 pad 1.27, 0.6 pad 1.93)
  Top 2.184: 228.P$1 v184.6,166 234.P$1 | 235.P$1 v184.6,134 236.P$1 | 237.P$1 v184.6,102 238.P$1 | 239.P$1 v184.6,70 240.P$1 | 218.P$1 v184.6,38 219.P$1 | GND9.1 217.P$1 | v184.6,9 220.P$1
  Bottom 2.184: v184.6,9 v184.6,38 v184.6,70 v184.6,102 v184.6,134 v184.6,166 GND9.1
N$1
  Top 0.254: 13.DATAS 18.7,190 18.7,196 19.2,196.5 DIN.1
N$2
  Top 0.254: 1.DATAS 13.9,190 13.9,174 2.DATAS
N$3
  Top 0.254: 15.DATAS 18.7,158 18.7,174 14.DATAS
N$4
  Top 0.254: 3.DATAS 13.9,158 13.9,142 4.DATAS
N$5
  Top 0.254: 16.DATAS 18.7,142 18.7,126 17.DATAS
N$6
  Top 0.254: 5.DATAS 13.9,126 13.9,110 6.DATAS
N$7
  Top 0.254: 19.DATAS 18.7,94 18.7,110 18.DATAS
N$8
  Top 0.254: 7.DATAS 13.9,94 13.9,78 8.DATAS
N$9
  Top 0.254: 21.DATAS 18.7,62 18.7,78 20.DATAS
N$10
  Top 0.254: 23.DATAS 18.7,30 18.7,46 22.DATAS
N$11
  Top 0.254: 9.DATAS 13.9,62 13.9,46 10.DATAS
N$12
  Top 0.254: 11.DATAS 13.9,30 13.9,14 12.DATAS
N$13
  Top 0.254: 29.DATAS 38,190 38,196 38.5,196.5 DIN1.1
N$14
  Top 0.254: 25.DATAS 33.2,190 33.2,174 36.DATAS
N$15
  Top 0.254: 31.DATAS 38,158 38,174 30.DATAS
N$16
  Top 0.254: 42.DATAS 33.2,158 33.2,142 43.DATAS
N$17
  Top 0.254: 32.DATAS 38,142 38,126 33.DATAS
N$18
  Top 0.254: 44.DATAS 33.2,126 33.2,110 45.DATAS
N$19
  Top 0.254: 35.DATAS 38,94 38,110 34.DATAS
N$20
  Top 0.254: 46.DATAS 33.2,94 33.2,78 47.DATAS
N$21
  Top 0.254: 38.DATAS 38,62 38,78 37.DATAS
N$22
  Top 0.254: 40.DATAS 38,30 38,46 39.DATAS
N$23
  Top 0.254: 48.DATAS 33.2,62 33.2,46 26.DATAS
N$24
  Top 0.254: 27.DATAS 33.2,30 33.2,14 28.DATAS
N$25
  Top 0.254: 53.DATAS 57.3,190 57.3,196 57.8,196.5 DIN2.1
N$26
  Top 0.254: 49.DATAS 52.5,190 52.5,174 60.DATAS
N$27
  Top 0.254: 55.DATAS 57.3,158 57.3,174 54.DATAS
N$28
  Top 0.254: 66.DATAS 52.5,158 52.5,142 67.DATAS
N$29
  Top 0.254: 56.DATAS 57.3,142 57.3,126 57.DATAS
N$30
  Top 0.254: 68.DATAS 52.5,126 52.5,110 69.DATAS
N$31
  Top 0.254: 59.DATAS 57.3,94 57.3,110 58.DATAS
N$32
  Top 0.254: 70.DATAS 52.5,94 52.5,78 71.DATAS
N$33
  Top 0.254: 62.DATAS 57.3,62 57.3,78 61.DATAS
N$34
  Top 0.254: 64.DATAS 57.3,30 57.3,46 63.DATAS
N$35
  Top 0.254: 72.DATAS 52.5,62 52.5,46 50.DATAS
N$36
  Top 0.254: 51.DATAS 52.5,30 52.5,14 52.DATAS
N$37
  Top 0.254: 77.DATAS 76.6,190 76.6,196 77.1,196.5 DIN3.1
N$38
  Top 0.254: 73.DATAS 71.8,190 71.8,174 84.DATAS
N$39
  Top 0.254: 79.DATAS 76.6,158 76.6,174 78.DATAS
N$40
  Top 0.254: 90.DATAS 71.8,158 71.8,142 91.DATAS
N$41
  Top 0.254: 80.DATAS 76.6,142 76.6,126 81.DATAS
N$42
  Top 0.254: 92.DATAS 71.8,126 71.8,110 93.DATAS
N$43
  Top 0.254: 83.DATAS 76.6,94 76.6,110 82.DATAS
N$44
  Top 0.254: 94.DATAS 71.8,94 71.8,78 95.DATAS
N$45
  Top 0.254: 86.DATAS 76.6,62 76.6,78 85.DATAS
N$46
  Top 0.254: 88.DATAS 76.6,30 76.6,46 87.DATAS
N$47
  Top 0.254: 96.DATAS 71.8,62 71.8,46 74.DATAS
N$48
  Top 0.254: 75.DATAS 71.8,30 71.8,14 76.DATAS
N$49
  Top 0.254: 101.DATAS 95.9,190 95.9,196 96.4,196.5 DIN4.1
N$50
  Top 0.254: 97.DATAS 91.1,190 91.1,174 108.DATAS
N$51
  Top 0.254: 103.DATAS 95.9,158 95.9,174 102.DATAS
N$52
  Top 0.254: 114.DATAS 91.1,158 91.1,142 115.DATAS
N$53
  Top 0.254: 104.DATAS 95.9,142 95.9,126 105.DATAS
N$54
  Top 0.254: 116.DATAS 91.1,126 91.1,110 117.DATAS
N$55
  Top 0.254: 107.DATAS 95.9,94 95.9,110 106.DATAS
N$56
  Top 0.254: 118.DATAS 91.1,94 91.1,78 119.DATAS
N$57
  Top 0.254: 110.DATAS 95.9,62 95.9,78 109.DATAS
N$58
  Top 0.254: 112.DATAS 95.9,30 95.9,46 111.DATAS
N$59
  Top 0.254: 120.DATAS 91.1,62 91.1,46 98.DATAS
N$60
  Top 0.254: 99.DATAS 91.1,30 91.1,14 100.DATAS
N$61
  Top 0.254: 125.DATAS 115.2,190 115.2,196 115.7,196.5 DIN5.1
N$62
  Top 0.254: 121.DATAS 110.4,190 110.4,174 132.DATAS
N$63
  Top 0.254: 127.DATAS 115.2,158 115.2,174 126.DATAS
N$64
  Top 0.254: 138.DATAS 110.4,158 110.4,142 139.DATAS
N$65
  Top 0.254: 128.DATAS 115.2,142 115.2,126 129.DATAS
N$66
  Top 0.254: 140.DATAS 110.4,126 110.4,110 141.DATAS
N$67
  Top 0.254: 131.DATAS 115.2,94 115.2,110 130.DATAS
N$68
  Top 0.254: 142.DATAS 110.4,94 110.4,78 143.DATAS
N$69
  Top 0.254: 134.DATAS 115.2,62 115.2,78 133.DATAS
N$70
  Top 0.254: 136.DATAS 115.2,30 115.2,46 135.DATAS
N$71
  Top 0.254: 144.DATAS 110.4,62 110.4,46 122.DATAS
N$72
  Top 0.254: 123.DATAS 110.4,30 110.4,14 124.DATAS
N$73
  Top 0.254: 149.DATAS 134.5,190 134.5,196 135,196.5 DIN6.1
N$74
  Top 0.254: 145.DATAS 129.7,190 129.7,174 156.DATAS
N$75
  Top 0.254: 151.DATAS 134.5,158 134.5,174 150.DATAS
N$76
  Top 0.254: 162.DATAS 129.7,158 129.7,142 163.DATAS
N$77
  Top 0.254: 152.DATAS 134.5,142 134.5,126 153.DATAS
N$78
  Top 0.254: 164.DATAS 129.7,126 129.7,110 165.DATAS
N$79
  Top 0.254: 155.DATAS 134.5,94 134.5,110 154.DATAS
N$80
  Top 0.254: 166.DATAS 129.7,94 129.7,78 167.DATAS
N$81
  Top 0.254: 158.DATAS 134.5,62 134.5,78 157.DATAS
N$82
  Top 0.254: 160.DATAS 134.5,30 134.5,46 159.DATAS
N$83
  Top 0.254: 168.DATAS 129.7,62 129.7,46 146.DATAS
N$84
  Top 0.254: 147.DATAS 129.7,30 129.7,14 148.DATAS
N$85
  Top 0.254: 173.DATAS 153.8,190 153.8,196 154.3,196.5 DIN7.1
N$86
  Top 0.254: 169.DATAS 149,190 149,174 180.DATAS
N$87
  Top 0.254: 175.DATAS 153.8,158 153.8,174 174.DATAS
N$88
  Top 0.254: 186.DATAS 149,158 149,142 187.DATAS
N$89
  Top 0.254: 176.DATAS 153.8,142 153.8,126 177.DATAS
N$90
  Top 0.254: 188.DATAS 149,126 149,110 189.DATAS
N$91
  Top 0.254: 179.DATAS 153.8,94 153.8,110 178.DATAS
N$92
  Top 0.254: 190.DATAS 149,94 149,78 191.DATAS
N$93
  Top 0.254: 182.DATAS 153.8,62 153.8,78 181.DATAS
N$94
  Top 0.254: 184.DATAS 153.8,30 153.8,46 183.DATAS
N$95
  Top 0.254: 192.DATAS 149,62 149,46 170.DATAS
N$96
  Top 0.254: 171.DATAS 149,30 149,14 172.DATAS
N$97
  Top 0.254: 197.DATAS 173.1,190 173.1,196 173.6,196.5 DIN8.1
N$98
  Top 0.254: 193.DATAS 168.3,190 168.3,174 204.DATAS
N$99
  Top 0.254: 199.DATAS 173.1,158 173.1,174 198.DATAS
N$100
  Top 0.254: 210.DATAS 168.3,158 168.3,142 211.DATAS
N$101
  Top 0.254: 200.DATAS 173.1,142 173.1,126 201.DATAS
N$102
  Top 0.254: 212.DATAS 168.3,126 168.3,110 213.DATAS
N$103
  Top 0.254: 203.DATAS 173.1,94 173.1,110 202.DATAS
N$104
  Top 0.254: 214.DATAS 168.3,94 168.3,78 215.DATAS
N$105
  Top 0.254: 206.DATAS 173.1,62 173.1,78 205.DATAS
N$106
  Top 0.254: 208.DATAS 173.1,30 173.1,46 207.DATAS
N$107
  Top 0.254: 216.DATAS 168.3,62 168.3,46 194.DATAS
N$108
  Top 0.254: 195.DATAS 168.3,30 168.3,14 196.DATAS
N$109
  Top 0.254: 221.DATAS 192.4,190 192.4,196 192.9,196.5 DIN9.1
N$110
  Top 0.254: 217.DATAS 187.6,190 187.6,174 228.DATAS
N$111
  Top 0.254: 223.DATAS 192.4,158 192.4,174 222.DATAS
N$112
  Top 0.254: 234.DATAS 187.6,158 187.6,142 235.DATAS
N$113
  Top 0.254: 224.DATAS 192.4,142 192.4,126 225.DATAS
N$114
  Top 0.254: 236.DATAS 187.6,126 187.6,110 237.DATAS
N$115
  Top 0.254: 227.DATAS 192.4,94 192.4,110 226.DATAS
N$116
  Top 0.254: 238.DATAS 187.6,94 187.6,78 239.DATAS
N$117
  Top 0.254: 230.DATAS 192.4,62 192.4,78 229.DATAS
N$118
  Top 0.254: 232.DATAS 192.4,30 192.4,46 231.DATAS
N$119
  Top 0.254: 240.DATAS 187.6,62 187.6,46 218.DATAS
N$120
  Top 0.254: 219.DATAS 187.6,30 187.6,14 220.DATAS
VCC  (via drill 0.6 pad 1.93)
  Top 2.184: 13.P$2 v21.7,182 14.P$2 | 15.P$2 v21.7,150 16.P$2 | 17.P$2 v21.7,118 18.P$2 | 19.P$2 v21.7,85.5 20.P$2 | 21.P$2 v21.7,54 22.P$2 | 23.P$2 v21.7,22 24.P$2
  Bottom 2.184: v21.7,22 v21.7,54 v21.7,85.5 v21.7,118 v21.7,150 v21.7,182 21.7,192.4 22.7,193.4 22.7,196.48 VCC.1
VCC1  (via drill 0.6 pad 1.93)
  Top 2.184: 29.P$2 v41,182 30.P$2 | 31.P$2 v41,150 32.P$2 | 33.P$2 v41,118 34.P$2 | 35.P$2 v41,85.5 37.P$2 | 38.P$2 v41,54 39.P$2 | 40.P$2 v41,22 41.P$2
  Bottom 2.184: v41,22 v41,54 v41,85.5 v41,118 v41,150 v41,182 41,192.4 42,193.4 42,196.48 VCC1.1
VCC2  (via drill 0.6 pad 1.93)
  Top 2.184: 53.P$2 v60.3,182 54.P$2 | 55.P$2 v60.3,150 56.P$2 | 57.P$2 v60.3,118 58.P$2 | 59.P$2 v60.3,85.5 61.P$2 | 62.P$2 v60.3,54 63.P$2 | 64.P$2 v60.3,22 65.P$2
  Bottom 2.184: v60.3,22 v60.3,54 v60.3,85.5 v60.3,118 v60.3,150 v60.3,182 60.3,192.4 61.3,193.4 61.3,196.48 VCC2.1
VCC3  (via drill 0.6 pad 1.93)
  Top 2.184: 77.P$2 v79.6,182 78.P$2 | 79.P$2 v79.6,150 80.P$2 | 81.P$2 v79.6,118 82.P$2 | 83.P$2 v79.6,85.5 85.P$2 | 86.P$2 v79.6,54 87.P$2 | 88.P$2 v79.6,22 89.P$2
  Bottom 2.184: v79.6,22 v79.6,54 v79.6,85.5 v79.6,118 v79.6,150 v79.6,182 79.6,192.4 80.6,193.4 80.6,196.48 VCC3.1
VCC4  (via drill 0.6 pad 1.93)
  Top 2.184: 101.P$2 v98.9,182 102.P$2 | 103.P$2 v98.9,150 104.P$2 | 105.P$2 v98.9,118 106.P$2 | 107.P$2 v98.9,85.5 109.P$2 | 110.P$2 v98.9,54 111.P$2 | 112.P$2 v98.9,22 113.P$2
  Bottom 2.184: v98.9,22 v98.9,54 v98.9,85.5 v98.9,118 v98.9,150 v98.9,182 98.9,192.4 99.9,193.4 99.9,196.48 VCC4.1
VCC5  (via drill 0.6 pad 1.93)
  Top 2.184: 125.P$2 v118.2,182 126.P$2 | 127.P$2 v118.2,150 128.P$2 | 129.P$2 v118.2,118 130.P$2 | 131.P$2 v118.2,85.5 133.P$2 | 134.P$2 v118.2,54 135.P$2 | 136.P$2 v118.2,22 137.P$2
  Bottom 2.184: v118.2,22 v118.2,54 v118.2,85.5 v118.2,118 v118.2,150 v118.2,182 118.2,192.4 119.2,193.4 119.2,196.48 VCC5.1
VCC6  (via drill 0.6 pad 1.93)
  Top 2.184: 149.P$2 v137.5,182 150.P$2 | 151.P$2 v137.5,150 152.P$2 | 153.P$2 v137.5,118 154.P$2 | 155.P$2 v137.5,85.5 157.P$2 | 158.P$2 v137.5,54 159.P$2 | 160.P$2 v137.5,22 161.P$2
  Bottom 2.184: v137.5,22 v137.5,54 v137.5,85.5 v137.5,118 v137.5,150 v137.5,182 137.5,192.4 138.5,193.4 138.5,196.48 VCC6.1
VCC7  (via drill 0.6 pad 1.93)
  Top 2.184: 173.P$2 v156.8,182 174.P$2 | 175.P$2 v156.8,150 176.P$2 | 177.P$2 v156.8,118 178.P$2 | 179.P$2 v156.8,85.5 181.P$2 | 182.P$2 v156.8,54 183.P$2 | 184.P$2 v156.8,22 185.P$2
  Bottom 2.184: v156.8,22 v156.8,54 v156.8,85.5 v156.8,118 v156.8,150 v156.8,182 156.8,192.4 157.8,193.4 157.8,196.48 VCC7.1
VCC8  (via drill 0.6 pad 1.93)
  Top 2.184: 197.P$2 v176.1,182 198.P$2 | 199.P$2 v176.1,150 200.P$2 | 201.P$2 v176.1,118 202.P$2 | 203.P$2 v176.1,85.5 205.P$2 | 206.P$2 v176.1,54 207.P$2 | 208.P$2 v176.1,22 209.P$2
  Bottom 2.184: v176.1,22 v176.1,54 v176.1,85.5 v176.1,118 v176.1,150 v176.1,182 176.1,192.4 177.1,193.4 177.1,196.48 VCC8.1
VCC9  (via drill 0.6 pad 1.93)
  Top 2.184: 221.P$2 v195.4,182 222.P$2 | 223.P$2 v195.4,150 224.P$2 | 225.P$2 v195.4,118 226.P$2 | 227.P$2 v195.4,85.5 229.P$2 | 230.P$2 v195.4,54 231.P$2 | 232.P$2 v195.4,22 233.P$2
  Bottom 2.184: v195.4,22 v195.4,54 v195.4,85.5 v195.4,118 v195.4,150 v195.4,182 195.4,192.4 196.4,193.4 196.4,196.48 VCC9.1

## Text on the board
tPlace: GND | DIN | VCC | GND | DIN | VCC | GND | DIN | VCC | GND | DIN | VCC | GND | DIN | VCC | GND | DIN | VCC | GND | DIN | VCC | GND | DIN | VCC | GND | DIN | VCC | GND | DIN | VCC | R | L | R | L | R | L | R | L | R | L | R | L | R | L | R | L | R | L | R | L | Wordclock - LedStrip connectors v1.0 | Christophe Cachin 2017